# Altium PCB switch_control_one.PcbDoc
Units mil, origin at the board's own origin, x right, y up, seen from the top; angles counter-clockwise.
Board outline 7080 x 3975 mil, 2 copper layers (Top Layer, Bottom Layer); 20 components, 14 nets, 47 pads, 0 vias.
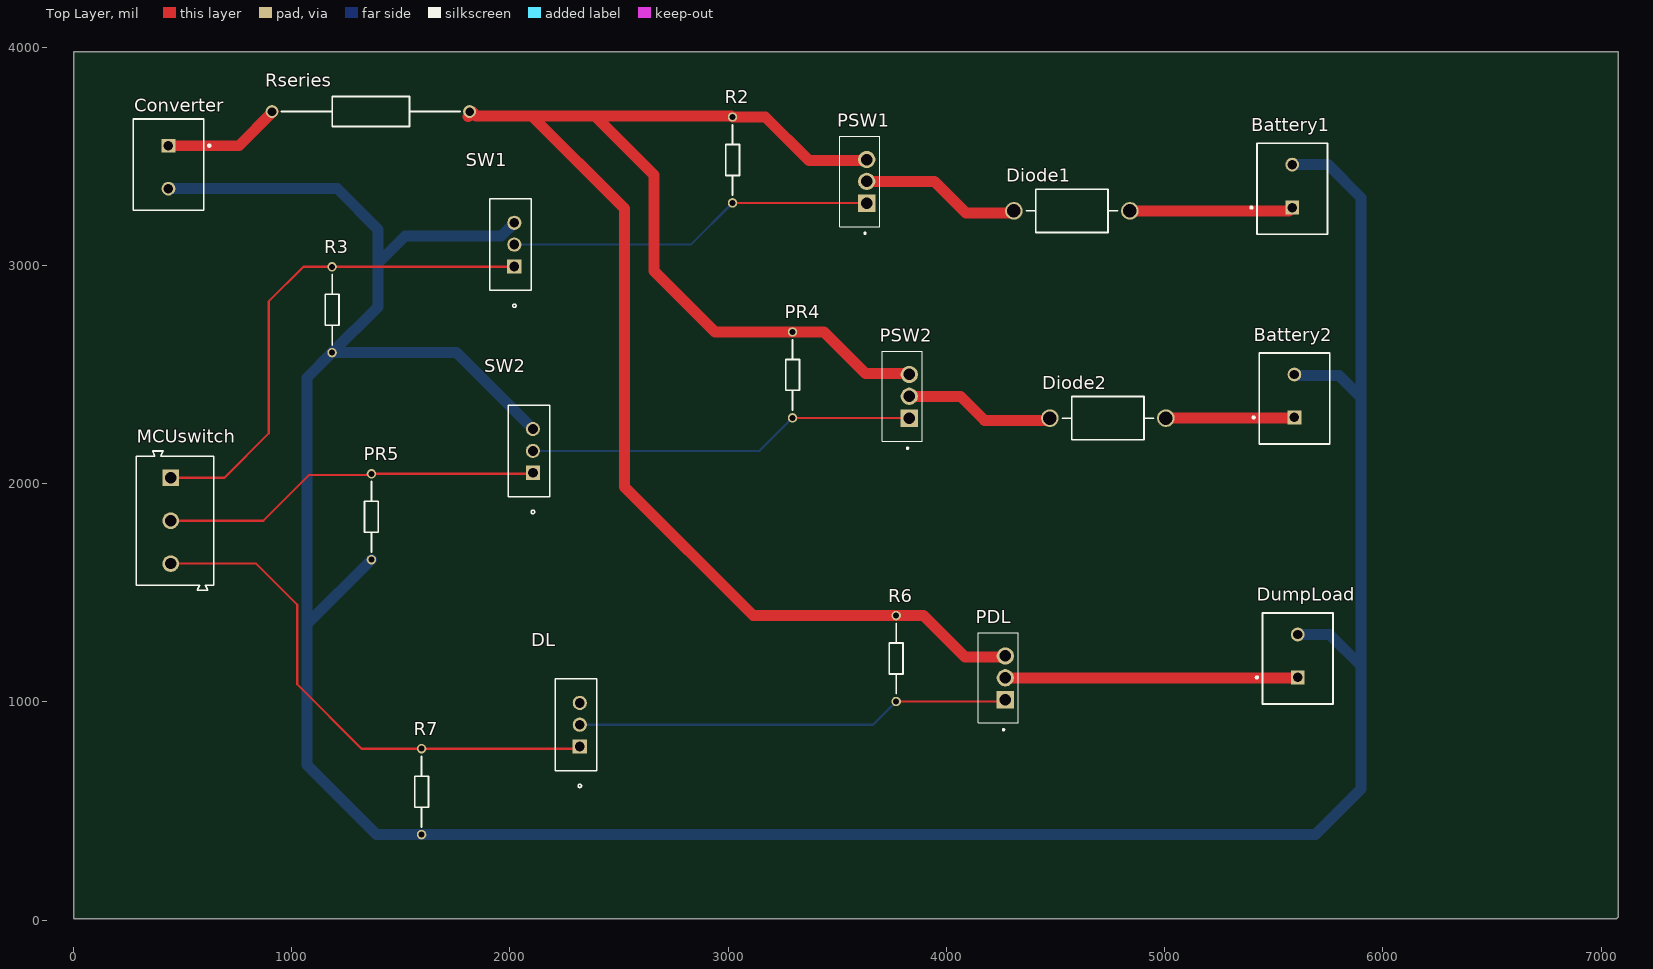
[diagram p0: Top Layer view]
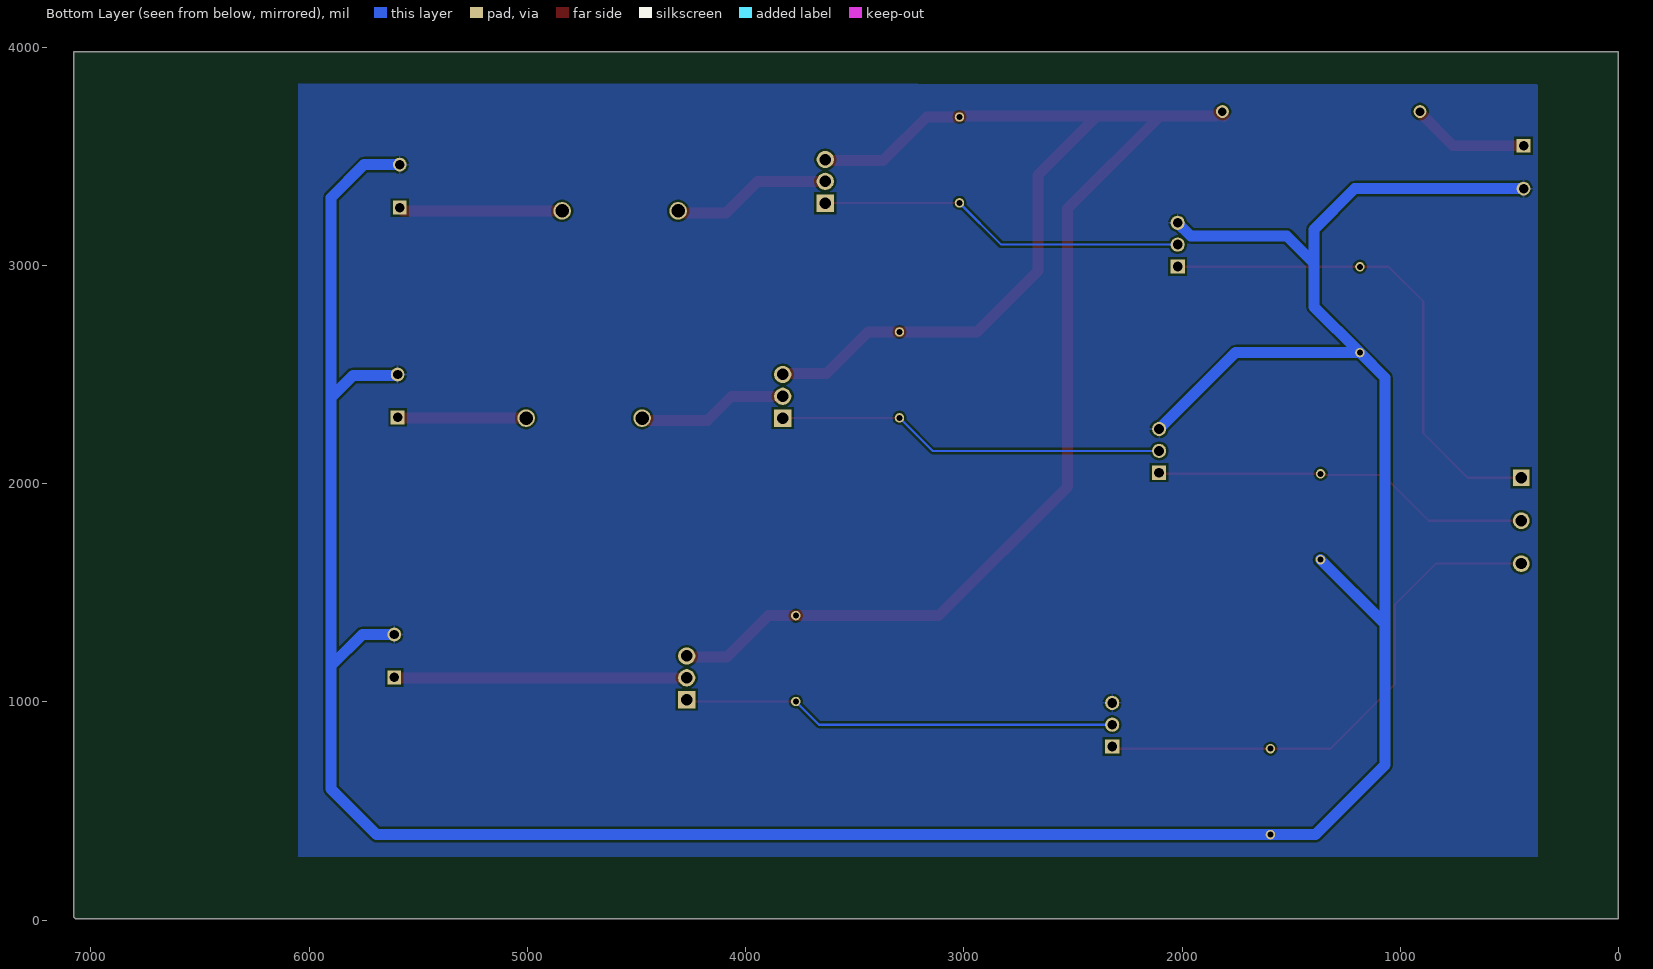
[diagram p1: Bottom Layer view, seen from below]

## Layer stack, top to bottom
Top Solder: solder mask 0.4, Solder Resist, Dk 3.5
Top Layer: signal copper 1.4
Dielectric 1: dielectric 12.6, FR-4, Dk 4.8
Bottom Layer: signal copper 1.4
Bottom Solder: solder mask 0.4, Solder Resist, Dk 3.5

## Board outline
0,5 0,3980 7080,3980 7080,15 7070,5

## Design rules (kind name [scope] priority, off if disabled: settings)
Clearance [All] p1: gap=10 ignorepadtopadclearanceinfootprint=FALSE except(0: Arc-Hole Track-Hole SMDPad-Hole THPad-Hole Via-Hole Fill-Hole Poly-Hole Region-Hole Text-Hole)
PolygonConnect [All] p1: connectstyle=Relief reliefconductorwidth=10 reliefentries=4 polygonreliefangle="90 Angle" airgapwidth=10
RoutingVias [All] p1: holewidth=28 width=50 viastyle="Through Hole" minholewidth=28 minwidth=50 maxholewidth=28 maxwidth=50
SilkToSolderMaskClearance [IsPad] p1: minsilkscreentomaskgap=8 clearancetoexposedcopper=TRUE
SolderMaskExpansion [All] p1: expansion=4 istentingtop=FALSE
Width [All] p1: maxlimit=60 minlimit=10 preferedwidth=50
29 further rules are at their usual default settings.

## Components (designator, comment, footprint, x,y, rotation, side; value= is the part's Value field where it differs from the comment)
Battery1 "282836-2" TECO-282836-2_V 5585,3363.43 r90 top
Battery2 "282836-2" TECO-282836-2_V 5595,2401.57 r90 top
Converter "282836-2" TECO-282836-2_V 435,3450 r270 top
Diode1 "1N5401" ONSC-AXIAL_LEAD-2-267-05_V 4575,3250 r180 top
Diode2 "1N5401" ONSC-AXIAL_LEAD-2-267-05_V 4740,2300 r180 top
DL "STP36NF06L" TO-220_STM 2320,795 r90 top
DumpLoad "282836-2" TECO-282836-2_V 5610,1210 r90 top
MCUswitch "691101710003" 691101710003 465,1830 r270 top
PDL "IRF9540" TO254P1052X465X1989-3 4270,1010 r90 top
PR4 "MBA02040Z0000ZC100" RESAD1000W50L360D160 3295,2695 r270 top
PR5 "MBA02040Z0000ZC100" RESAD1000W50L360D160 1365,1651.3 r90 top
PSW1 "IRF9540" TO254P1052X465X1989-3 3635,3285 r90 top
PSW2 "IRF9540" TO254P1052X465X1989-3 3830,2300 r90 top
R2 "MBA02040Z0000ZC100" RESAD1000W50L360D160 3020,3680 r270 top
R3 "MBA02040Z0000ZC100" RESAD1000W50L360D160 1185,2600 r90 top
R6 "MBA02040Z0000ZC100" RESAD1000W50L360D160 3770,1395 r270 top
R7 "MBA02040Z0000ZC100" RESAD1000W50L360D160 1595,391.3 r90 top
Rseries "SPRX1CT52RR20J" RESAD2300W80L900D350 909.49,3705 r0 top
SW1 "STP36NF06L" TO-220_STM 2020,2995 r90 top
SW2 "STP36NF06L" TO-220_STM 2105,2050 r90 top

## Footprints (in the part's own frame and the unit in brackets; to place one, negate y for a bottom-side part, rotate by r counter-clockwise, add the part's x,y. Pads: shape width x height; smd on the part's side, far side on the other; paste and mask are expansions set on the pad)
691101710003 [mm] "5,00mm - modular - blue - Horizontal entry with pressure clamp - 12,6mm height - 03p"
  rect 1.95x1.95 hole 1.3: 1(-5,-0.5)
  round 1.95 hole 1.3: 2(0,-0.5) 3(5,-0.5)
  silkscreen extent -8.1,-4.5 8.1,4.5, body extent -8.1,-4.5 8.1,4.5, height 12.65
ONSC-AXIAL_LEAD-2-267-05_V [mm] "AXIAL, 2-Leads, Diameter 5.05mm"
  round 2.05 hole 1.55: 1(-6.745,0) 2(6.745,0)
  silkscreen extent -5.32,-2.52 5.32,2.52
RESAD1000W50L360D160 [mm]
  round 1.1 hole 0.7: 1(0,0) 2(10,0)
  silkscreen extent 0.9,-0.8 9.1,0.8
RESAD2300W80L900D350 [mm]
  round 1.5 hole 1: 1(0,0) 2(23,0)
  silkscreen extent 1.1,-1.75 21.9,1.75, body extent -0.4,-2 23.4,2, height 3.99
TECO-282836-2_V [mm] "Female Header, Pitch 5mm, 1 x 2 Position, Height 10mm"
  rect 1.6x1.6 hole 1.1: 1(-2.5,0)
  round 1.6 hole 1.1: 2(2.5,0)
  silkscreen extent -5.6,-4.1 5,4.87, body extent -5.6,-4.1 5,4.1, height 10
TO254P1052X465X1989-3 [mm]
  rect 2.01x2.01 hole 1.34: 1(0,0)
  round 2.01 hole 1.34: 2(2.54,0) 3(5.08,0)
  silkscreen extent -3.6,-1.5 7.8,3.16
TO-220_STM [mil]
  rect 65x65 hole 45: 1(0,0)
  round 65 hole 45: 2(100,0) 3(200,0)
  silkscreen extent -188,-78 310,113, body extent -105,-74 305,108, height 776

## Part data
Battery1 Battery2 Converter DumpLoad: library part CMP-1684-00017-1, "Female Header, Pitch 5 mm, 1 x 2 Position, Height 10 mm, Tail Length 3.5 mm, Rohs, Bulk", Color=Green, Current=13.5A, Manufacturer="TE Connectivity", Package Description="Female Header, Pitch 5 mm, 1 x 2 Position, Height 10 mm, Tail Length 3.5 mm", Package Reference=THD, Standard Package=300, Voltage=300V, 3D Model=282836-2.pdf, Category=Connectors,Interconnects, Clamp Material - Plating=Brass-NickelPlated, Contact Material - Plating=Brass-TinPlated, Datasheet URL=http://www.te.com.cn/commerce/DocumentDelivery/DDEController?Action=showdoc&DocId=Catalog+Section%7F1308389_EUROSTYLE_TERMINAL_BLOCKS%7F0607%7Fpdf%7FEnglish%7FENG_CS_1308389_EUROSTYLE_TERMINAL_BLOCKS_0607.pdf%7F282836-2, Dynamic Catalog=BuchananSeries, Family=TerminalBlocks-WiretoBoard, Featured Product=EurostyleTerminalBlockConnectors, Features=Interlocking(Side), Housing Material=Polyamide(PA66),Nylon6/6, Manufacturer URL=http://www.te.com, Mating Orientation=HorizontalwithBoard, Mounting Type=ThroughHole, Number of Levels=1, Other Names="5ULV-02B / A98076", Packaging=Bulk, Pitch="0.197\"(5.00mm)", Positions Per Level=2, Product Training Modules=Wire-to-BoardEurostyleTerminalBlocks, RoHS Information=282836-2StatementofCompliance, Screw Material - Plating=Brass-NickelPlated, Screw Thread=M3, Series=Buchanan, Torque - Screw=0.68Nm(6Lb-In), Wire Gauge=16-30AWG, Wire Termination=Screw-RisingCageClamp
Diode1 Diode2: library part CMP-0902-00078-1, "Standard Recovery Rectifier, 2-Pin Axial_Lead, Pb-Free, Bulk Box", Manufacturer="On Semiconductor", ComponentLink1Description="Manufacturer URL", ComponentLink1URL=http://www.onsemi.com/, ComponentLink2Description=Datasheet, ComponentLink2URL=http://www.onsemi.com/pub_link/Collateral/1N5400-D.PDF, ComponentLink3Description="Package Specification", ComponentLink3URL=http://www.onsemi.com/pub_link/Collateral/267-05.PDF, DatasheetVersion="Rev. 10", IFSM Max (A)=200, IO(rec) Max (A)=3, Mounting Technology="Through Hole", PackageDescription="2-Pin, Axial Lead, Diameter 5.05 mm", PackageReference=AXIAL_LEAD-2-267-05, PackageVersion="Rev. G, 06/2000", Packing="Bulk Box", PartNumber=1N5401, RoHS=TRUE, Type="Standard Recovery", VRRM Max (V)=100
DL SW1 SW2: "No Description Available", Mfr_Name=STMicroelectronics, Copyright="Copyright (C) 2022 Ultra Librarian. All rights reserved.", Digi-Key_Part_Number_1=497-7522-5-ND, Manufacturer_Part_Number=STP36NF06L, RefDes=RefDes, Type=DEV
MCUswitch: library part CMP-1502-03257-1, "Series 101 - 5.00 mm Horizontal Entry Modular with Pressure Clamp WR-TBL, 3 pin", Manufacturer="Wurth Elektronik", Operating Temperature=-40to105degC, Datasheet URL=http://katalog.we-online.de/em/datasheet/6911017100xx.pdf, Manufacturer URL=http://www.we-online.de, Mounting Technology=THT, Package Reference=691101710003, Packaging=Box, Part Number=691101710003, Pin Number=3, Pitch=5.00mm, Publisher=WurthElektronik
PDL PSW1 PSW2: "P-Channel 100V 19A (Tc) 150W (Tc) Through Hole TO-220AB", Package="TO-220 International Rectifier", Digi-Key_Part_Number=IRF9540PBF-ND, MF="Vishay Siliconix", MP=IRF9540, SnapEDA_Link=https://www.snapeda.com/parts/IRF9540/Vishay%20Siliconix/view-part/1087953/?ref=snap
PR4 PR5 R2 R3 R6 R7: "Resistor", Manufacturer_Name=Vishay, Datasheet Link=https://www.vishay.com/docs/28766/mbxsma.pdf, Manufacturer_Part_Number=MBA02040Z0000ZC100
Rseries: "Resistor", Manufacturer_Name="KOA Speer", Datasheet Link=https://componentsearchengine.com/Datasheets/1/SPRX1CT52RR20J.pdf, Manufacturer_Part_Number=SPRX1CT52RR20J

## Nets (pads, with @x,y where several pads share a name; then routed paths per layer and width w, separated by ;. In a path a pad name is that pad's centre, name@x,y a point inside that pad or via, vN(x,y) a via of type N, cw(c..) or ccw(c..) an arc to the next point about the centre after c; other vN are vias at no path point)
GND: Battery1.2 Battery2.2 Converter.2 DL.3 DumpLoad.2 PR5.1 R3.1 R7.1 SW1.3 SW2.3 | length 14645
  Bottom Layer w50: Converter.2 1208.43,3351.57 1395,3165 1395,3010 ; PR5.1 1070,1356.3 ; SW1.3 1960,3135 1520,3135 1395,3010 ; SW2.3 1755,2600 R3.1 ; Battery1.2 5748.15,3461.85 5900,3310 5900,2395 ; Battery2.2 5600,2495 5800,2495 5900,2395 ; DumpLoad.2 5756.57,1308.43 5900,1165 ; 1070,1356.3 1070,2485 R3.1 ; 1070,1356.3 1070,710 1388.7,391.3 R7.1 5691.3,391.3 5900,600 5900,1165 ; R3.1 1395,2810 1395,3010 ; 5900,1165 5900,2395
NetBattery1_1: Battery1.1 Diode1.1 | length 750.7
  Top Layer w10: Battery1.1@5570,3250 Battery1.1
  Top Layer w50: Diode1.1 Battery1.1@5570,3250
NetBattery2_1: Battery2.1 Diode2.1 | length 590.8
  Top Layer w10: Battery2.1@5591.85,2300 Battery2.1
  Top Layer w50: Diode2.1 Battery2.1@5591.85,2300
NetConverter_1: Converter.1 Rseries.1 | length 544.7
  Top Layer w50: Converter.1 758.43,3548.43 Rseries.1@914.87,3704.87
NetDiode1_2: Diode1.2 PSW1.2 | length 738.7
  Top Layer w50: PSW1.2 3945,3385 4090,3240 4299.45,3240 Diode1.2
NetDiode2_2: Diode2.2 PSW2.2 | length 694.2
  Top Layer w50: PSW2.2 4065,2400 4175,2290 4464.45,2290 Diode2.2
NetDL_1: DL.1 MCUswitch.3 R7.2 | length 2444
  Top Layer w10: MCUswitch.3 836.84,1633.16 1025,1445 1025,1080 1320,785 R7.2 2310,785 DL.1
NetDL_2: DL.2 PDL.1 R6.2 | length 1997.6
  Top Layer w10: R6.2 4261.3,1001.3 PDL.1
  Bottom Layer w10: DL.2 3663.7,895 R6.2
NetDumpLoad_1: DumpLoad.1 PDL.2 | length 1340.7
  Top Layer w10: DumpLoad.1@5608.43,1110 DumpLoad.1
  Top Layer w50: PDL.2 DumpLoad.1@5608.43,1110
NetMCUswitch_1: MCUswitch.1 R3.2 SW1.1 | length 2330.1
  Top Layer w10: MCUswitch.1 691.86,2026.86 895,2230 895,2835 1053.7,2993.7 R3.2 2018.7,2993.7 SW1.1
NetMCUswitch_2: MCUswitch.2 PR5.2 SW2.1 | length 1750.8
  Top Layer w10: MCUswitch.2 870.01,1830.01 1080,2040 1360,2040 PR5.2 2100,2045 SW2.1
NetPR4_2: PR4.2 PSW2.1 SW2.2 | length 1788.2
  Top Layer w10: PR4.2 3828.7,2301.3 PSW2.1
  Bottom Layer w10: SW2.2 3143.7,2150 PR4.2
NetPSW1_1: PSW1.1 R2.2 SW1.2 | length 1694.8
  Top Layer w10: R2.2 3633.7,3286.3 PSW1.1
  Bottom Layer w10: SW1.2 2828.7,3095 R2.2
VCC: PDL.3 PR4.1 PSW1.3 PSW2.3 R2.1 R6.1 Rseries.2 | length 8084.7
  Top Layer w50: Rseries.2@1808.51,3682.34 1811.17,3685 1815,3685 Rseries.2 1825.39,3705 1845.39,3685 2100,3685 ; PSW1.3@3630,3490 PSW1.3 3630,3480 3370,3480 3170,3680 R2.1 3015,3685 2390,3685 ; PSW2.3 3825,2505 3630,2505 3440,2695 PR4.1 2940,2695 2660,2975 2660,3415 2390,3685 ; PDL.3 4265,1205 4085,1205 3895,1395 R6.1 3115,1395 2525,1985 2525,3260 2100,3685 ; 2100,3685 2390,3685

## Polygon pours and split planes (outlines as drawn)
GND on Bottom Layer "GND_L02_P000" (solid, pour order 0): 375,3830 370,3825 370,290 6050,290 6050,3835

## Silkscreen, mask and mechanical layers (free items; w line width, h text height)
Mechanical 1:
  lines w10: 0,0 7080,0 7080,3980 7070,3990 0,3990 0,0